# EAGLE board CAN Transceiver 4.1 rev1 (EAGLE 9.6.2)
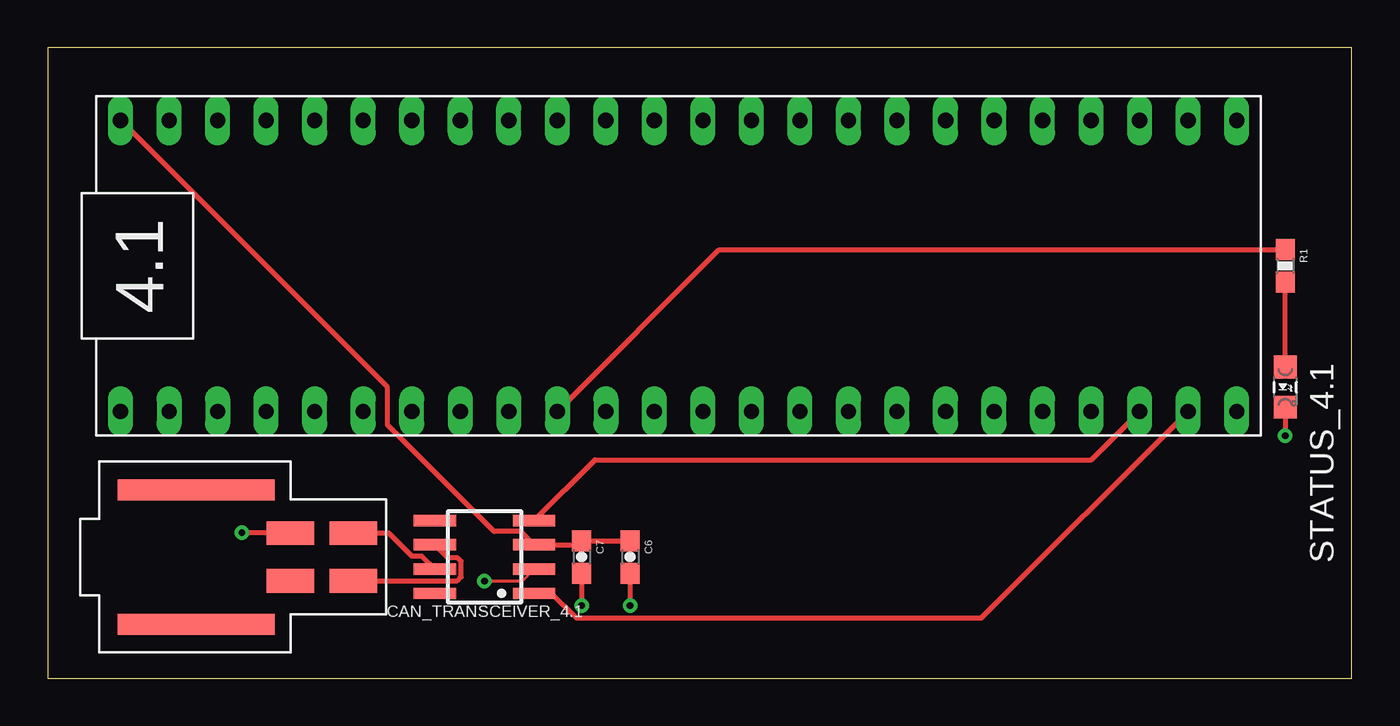
[diagram p0: board, top side]
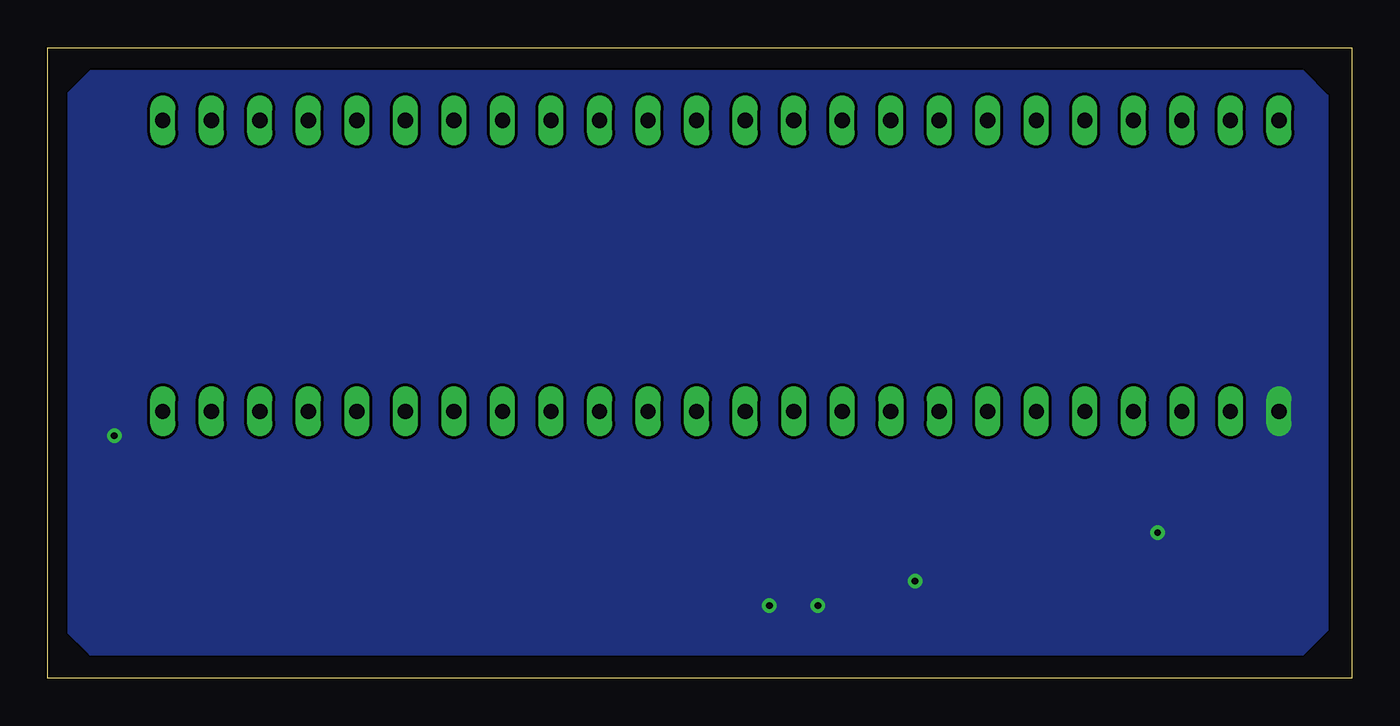
[diagram p1: board, bottom side, seen from below]

Size 68.25 x 33.01 mm. Coordinates in mm from the lower left corner, seen from the top.
Outline: 0,0 68.25,0 68.25,33.01 0,33.01 0,0
Copper layers (1*16): Top 0.035mm / dielectric 1.5mm / Bottom 0.035mm
Design rules "default": minimum track width 6mil, minimum drill 0.35mm, track to track 6mil, track to pad 6mil, pad to pad 6mil, via to via 6mil, smd to smd 6mil, copper to edge 40mil, drill to drill 6mil, minimum pad ring 10mil, minimum via ring 8mil, stop-mask expansion 4mil, vias tented up to drill 0mil, thermal gap 10mil

## Footprints (pad centres in the part's own frame; a part is rotated, then mirrored left to right if it is on the bottom)
0603-CAP = smd 1.1 x 1: 1 -0.85,0; 2 0.85,0
SOIC-08 = smd 0.6 x 2.2: 1 -1.905,-2.6; 2 -0.635,-2.6; 3 0.635,-2.6; 4 1.905,-2.6; 5 1.905,2.6; 6 0.635,2.6; 7 -0.635,2.6; 8 -1.905,2.6
0603-RES = smd 1.1 x 1: 1 -0.85,0; 2 0.85,0
LED-805 = smd 1.2 x 1.2: A 0,-1.05; C 0,1.05
TEENSY_4.1_SIMPLE = drill 0.8 long: 3.3V 1.27,24.13; 3.3V2 16.51,54.61; A0(TX3) 16.51,29.21; A1(RX3) 16.51,31.75; A2 16.51,34.29; A3 16.51,36.83; A4 16.51,39.37; A5 16.51,41.91; A6 16.51,44.45; A7 16.51,46.99; A8(CANTX2) 16.51,49.53; A9(CANRX2) 16.51,52.07; A10 1.27,21.59; A11 1.27,19.05; A12 1.27,16.51; A13 1.27,13.97; A14 16.51,13.97; A15 16.51,16.51; A16 16.51,19.05; A17 16.51,21.59; D0(RX1) 1.27,57.15; D1(TX1) 1.27,54.61; D2 1.27,52.07; D3 1.27,49.53; D4 1.27,46.99; D5 1.27,44.45; D6 1.27,41.91; D7(RX2) 1.27,39.37; D8(TX2) 1.27,36.83; D9 1.27,34.29; D10 1.27,31.75; D11 1.27,29.21; D12 1.27,26.67; D13 16.51,26.67; D28 1.27,11.43; D29 1.27,8.89; D30(CANRX) 1.27,6.35; D31(CANTX) 1.27,3.81; D32 1.27,1.27; D33 16.51,1.27; D34 16.51,3.81; D35 16.51,6.35; D36 16.51,8.89; D37 16.51,11.43; GND 1.27,59.69; GND2 16.51,57.15; GND3 16.51,24.13; VIN 16.51,59.69
NANO-FIT_RIGHT_ANGLE-4-SURFACE = smd 1.24 x 2.5: 1 1.25,0; 2 -1.25,0; 3 1.25,3.3; 4 -1.25,3.3 | smd 1.1 x 8.2: P$5 -3.52,-4.93; P$6 3.52,-4.93

## Placement (x,y rotation side)
C6  1uF  [0603-CAP]  30.48,6.35 270 top
C7  .1uF  [0603-CAP]  27.94,6.35 270 top
CAN_TRANSCEIVER_4.1  MCP2562SOIC-08  [SOIC-08]  22.86,6.35 90 top
R1  1k  [0603-RES]  64.77,21.59 270 top
STATUS_4.1  Red  [LED-805]  64.77,15.24 180 top
U$2  TEENSY_4.1_SIMPLE  [TEENSY_4.1_SIMPLE]  63.5,12.7 90 top
X1  CONNECTOR-4NANO-FIT_RIGHT_ANGLE-4-SURFACE  [NANO-FIT_RIGHT_ANGLE-4-SURFACE]  12.7,6.35 270 top

## Library data of the parts
C6 C7 CAN_TRANSCEIVER_4.1 R1 STATUS_4.1 U$2 X1 = HyTechDevices

## Nets
+3V3: CAN_TRANSCEIVER_4.1.5
+5V: C6.1 C7.1 CAN_TRANSCEIVER_4.1.3 U$2.VIN
CANH: CAN_TRANSCEIVER_4.1.7 X1.4
CANL: CAN_TRANSCEIVER_4.1.6 X1.3
GND: C6.2 C7.2 CAN_TRANSCEIVER_4.1.2 STATUS_4.1.C U$2.GND X1.2
N$1: CAN_TRANSCEIVER_4.1.4 U$2.D30(CANRX)
N$2: CAN_TRANSCEIVER_4.1.1 U$2.D31(CANTX)
N$3: R1.2 STATUS_4.1.A
N$4: R1.1 U$2.D8(TX2)
N$5: CAN_TRANSCEIVER_4.1.8

## Tracks (layer width: path | path; a pad name or v marks a point on that pad's centre or on a via)
+5V
  Top 0.254: C6.1 C7.1 27.73,6.99 CAN_TRANSCEIVER_4.1.3 24.77,7.68 23.37,7.68 17.78,13.27 17.78,15.24 U$2.VIN
CANH
  Top 0.254: CAN_TRANSCEIVER_4.1.7 19.57,6.41 19.04,6.41 17.85,7.6 X1.4
CANL
  Top 0.254: CAN_TRANSCEIVER_4.1.6 20.95,6.29 21.48,6.29 21.64,6.13 21.64,5.3 21.44,5.1 X1.3
GND  (via drill 0.35)
  Top 0.152: CAN_TRANSCEIVER_4.1.2 24.82,5.08 v22.86,5.08
  Top 0.254: X1.2 10.18,7.6 v10.16,7.62 | CAN_TRANSCEIVER_4.1.2 24.58,5.71 | C7.2 v27.94,3.81 | C6.2 v30.48,3.81 | STATUS_4.1.C v64.77,12.7
  pour Bottom (no thermals): 2.54,31.75 66.04,31.75 67.31,30.48 67.31,2.54 66.04,1.27 2.54,1.27 1.27,2.54 1.27,30.48
N$1
  Top 0.254: CAN_TRANSCEIVER_4.1.4 28.64,11.43 54.61,11.43 U$2.D30(CANRX)
N$2
  Top 0.254: CAN_TRANSCEIVER_4.1.1 26.38,4.45 27.67,3.15 48.87,3.15 U$2.D31(CANTX)
N$3
  Top 0.254: STATUS_4.1.A R1.2
N$4
  Top 0.254: U$2.D8(TX2) 35.14,22.44 R1.1